# EAGLE board LDS5362BS (EAGLE 7.2.0)
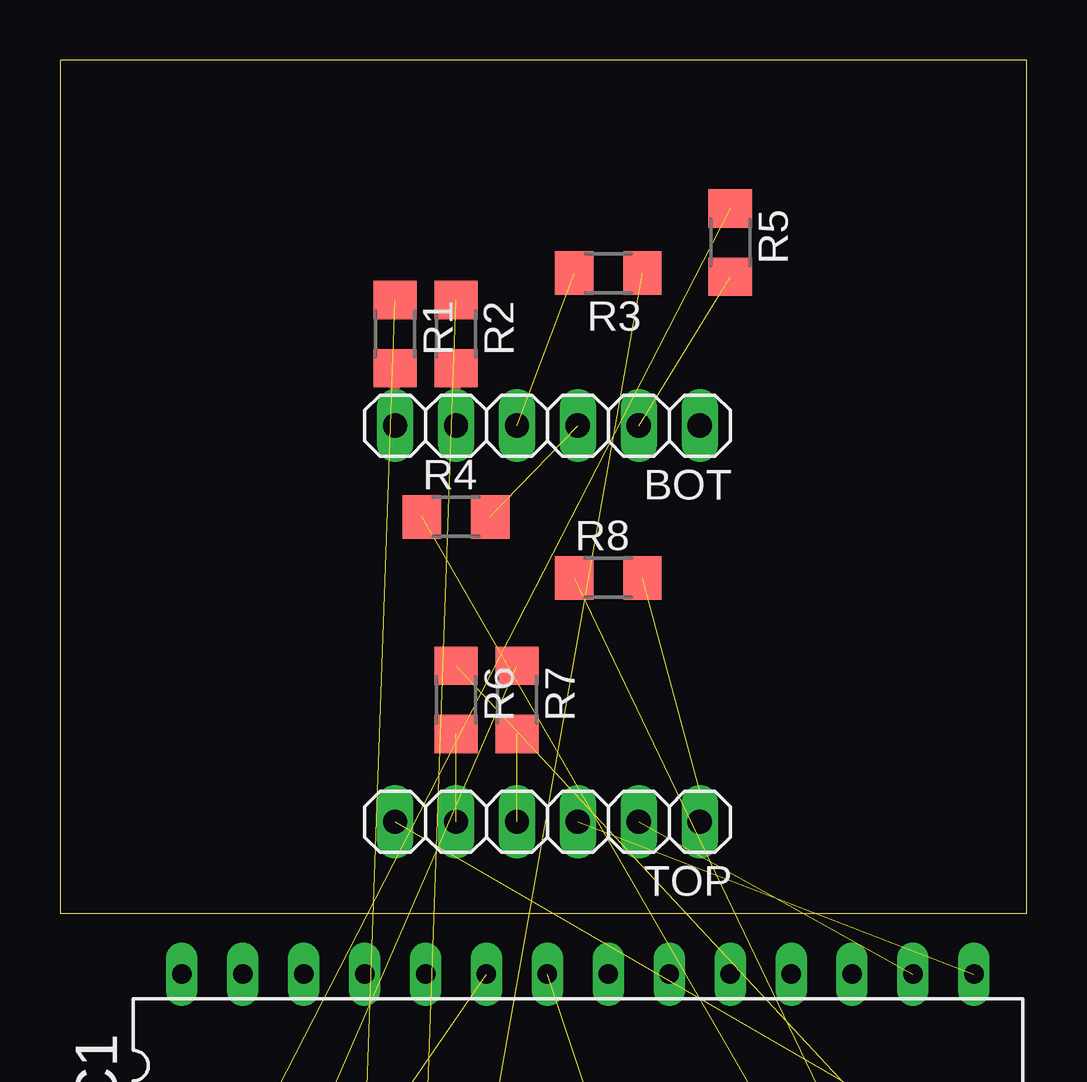
[diagram p0: board, top side]

Size 40.31 x 35.55 mm. Coordinates in mm from the lower left corner, seen from the top.
Outline: 0,0 40.31,0 40.31,35.55 0,35.55 0,0
Copper layers (1*16): Top 0.035mm / dielectric 1.5mm / Bottom 0.035mm
Design rules "default": minimum track width 10mil, minimum drill 24mil, track to track 8mil, track to pad 8mil, pad to pad 8mil, via to via 8mil, smd to smd 8mil, copper to edge 40mil, drill to drill 8mil, minimum pad ring 10mil, minimum via ring 8mil, stop-mask expansion 4mil, vias tented up to drill 0mil, thermal gap 10mil

## Footprints (pad centres in the part's own frame; a part is rotated, then mirrored left to right if it is on the bottom)
1X06 = drill 1.016 long: 1 -6.35,0; 2 -3.81,0; 3 -1.27,0; 4 1.27,0; 5 3.81,0; 6 6.35,0
153CLV-0505 = smd 3 x 1.6: + 2.2,0; - -2.2,0
DIL28-3 = drill 0.813 long: 1 -16.51,-3.81; 2 -13.97,-3.81; 3 -11.43,-3.81; 4 -8.89,-3.81; 5 -6.35,-3.81; 6 -3.81,-3.81; 7 -1.27,-3.81; 8 1.27,-3.81; 9 3.81,-3.81; 10 6.35,-3.81; 11 8.89,-3.81; 12 11.43,-3.81; 13 13.97,-3.81; 14 16.51,-3.81; 15 16.51,3.81; 16 13.97,3.81; 17 11.43,3.81; 18 8.89,3.81; 19 6.35,3.81; 20 3.81,3.81; 21 1.27,3.81; 22 -1.27,3.81; 23 -3.81,3.81; 24 -6.35,3.81; 25 -8.89,3.81; 26 -11.43,3.81; 27 -13.97,3.81; 28 -16.51,3.81
1X02 = drill 1.016 long: 1 -1.27,0; 2 1.27,0
1X04 = drill 1.016 long: 1 -3.81,0; 2 -1.27,0; 3 1.27,0; 4 3.81,0
R1206 = smd 1.6 x 1.803: 1 -1.422,0; 2 1.422,0

## Placement (x,y rotation side)
BOT  [1X06]  20.32,20.32 180 top
C1  [153CLV-0505]  -15.24,-19.05 0 top  (outside the outline)
IC1  MEGA8-P  [DIL28-3]  21.59,-6.35 0 top
JP1  [1X02]  -22.86,-20.32 0 top  (outside the outline)
JP2  [1X04]  0,-22.86 0 top  (outside the outline)
R1  1k5  [R1206]  13.97,24.13 270 top
R2  1k5  [R1206]  16.51,24.13 270 top
R3  1k5  [R1206]  22.86,26.67 180 top
R4  1k5  [R1206]  16.51,16.51 0 top
R5  1k5  [R1206]  27.94,27.94 270 top
R6  1k5  [R1206]  16.51,8.89 270 top
R7  1k5  [R1206]  19.05,8.89 270 top
R8  1k5  [R1206]  22.86,13.97 0 top
R9  4k7  [R1206]  -3.81,-15.24 0 top  (outside the outline)
R10  4k7  [R1206]  -8.89,-21.59 0 top  (outside the outline)
TOP  [1X06]  20.32,3.81 180 top

## Library data of the parts
BOT JP1 JP2 TOP = pinhead
C1 = rcl
IC1 = atmel; OC_FARNELL: unknown; OC_NEWARK: unknown
R1-R10 = resistor; SPICEPREFIX: R

## Nets
A: IC1.13 R6.1
AVCC: IC1.20
B: IC1.12 R8.1
C: IC1.11 R4.1
D: IC1.5 R2.1
DP: IC1.6 R3.1
E: IC1.4 R1.1
F: IC1.3 R7.1
G: IC1.2 R5.1
GND: C1.- IC1.8 IC1.22 JP1.2 JP2.2
LEFT: IC1.14 TOP.6
MIDDLE: IC1.15 TOP.3
N$1: R8.2 TOP.1
N$2: R7.2 TOP.4
N$3: R6.2 TOP.5
N$4: BOT.2 R5.2
N$5: BOT.3 R4.2
N$6: BOT.4 R3.2
N$7: BOT.5 R2.2
N$8: BOT.6 R1.2
N$9: IC1.1 R9.2
RIGHT: IC1.16 TOP.2
TEMP: IC1.23 JP2.4 R10.2
VCC: C1.+ IC1.7 JP1.1 JP2.1 R9.1 R10.1

## Tracks (layer width: path | path; a pad name or v marks a point on that pad's centre or on a via)
A  (1 unrouted)
B  (1 unrouted)
C  (1 unrouted)
D  (1 unrouted)
DP  (1 unrouted)
E  (1 unrouted)
F  (1 unrouted)
G  (1 unrouted)
GND  (4 unrouted)
LEFT  (1 unrouted)
MIDDLE  (1 unrouted)
N$1  (1 unrouted)
  Top 0.406: TOP.1 26.67,5.08
N$2  (1 unrouted)
N$3  (1 unrouted)
N$4  (1 unrouted)
N$5  (1 unrouted)
N$6  (1 unrouted)
N$7
  Top 0.406: BOT.5 R2.2
N$8
  Top 0.406: BOT.6 R1.2
N$9  (1 unrouted)
RIGHT  (1 unrouted)
TEMP  (2 unrouted)
VCC  (5 unrouted)